# EAGLE board Servomoter (EAGLE 9.7.0)

Size 170.57 x 98.59 mm. Coordinates in mm from the lower left corner, seen from the top.
Outline: 0,0 170.57,0 170.57,98.59 0,98.59 0,0
Copper layers (1*16): Top 0.035mm / dielectric 1.5mm / Bottom 0.035mm
Design rules "default": minimum track width 6mil, minimum drill 0.35mm, track to track 6mil, track to pad 6mil, pad to pad 6mil, via to via 6mil, smd to smd 6mil, copper to edge 40mil, drill to drill 6mil, minimum pad ring 10mil, minimum via ring 8mil, stop-mask expansion 4mil, vias tented up to drill 0mil, thermal gap 10mil

## Footprints (pad centres in the part's own frame; a part is rotated, then mirrored left to right if it is on the bottom)
RESAD1016W63L850D250B = drill 0.83 pad 1.43: 1 -5.08,0; 2 5.08,0
SWITCH-MOMENTARY-PTH-6.5MM = drill 1.016 pad 1.88: 1 -3.251,2.261; 2 3.251,2.261; 3 -3.251,-2.261; 4 3.251,-2.261
SG90 = drill 1.016 long: 1 -2.54,0; 2 0,0; 3 2.54,0
ARDUINO-UNO-R3-SHIELD = drill 1.016 pad 1.88: 3.3V 24.13,-2.54; 5V 24.13,0; A0 24.13,12.7; A1 24.13,15.24; A2 24.13,17.78; A3 24.13,20.32; A4 24.13,22.86; A5 24.13,25.4; AREF -24.13,-13.97; D2 -24.13,20.32; D3 -24.13,17.78; D4 -24.13,15.24; D5 -24.13,12.7; D6 -24.13,10.16; D7 -24.13,7.62; D8 -24.13,3.81; D9 -24.13,1.27; D10 -24.13,-1.27; D11 -24.13,-3.81; D12 -24.13,-6.35; D13 -24.13,-8.89; GND@0 24.13,2.54; GND@1 24.13,5.08; GND@2 -24.13,-11.43; IOREF 24.13,-7.62; NC 24.13,-10.16; RES 24.13,-5.08; RX -24.13,25.4; SCL -24.13,-19.05; SDA -24.13,-16.51; TX -24.13,22.86; VIN 24.13,7.62

## Placement (x,y rotation side)
R1  1k  [RESAD1016W63L850D250B]  82.79,59.86 90 top
R2  1k  [RESAD1016W63L850D250B]  82.79,34.46 90 top
R3  1k  [RESAD1016W63L850D250B]  82.79,16.68 90 top
S1  SWITCH_MOMENTARY  [SWITCH-MOMENTARY-PTH-6.5MM]  94.22,52.24 0 top
S2  SWITCH_MOMENTARY  [SWITCH-MOMENTARY-PTH-6.5MM]  94.22,26.84 0 top
S3  SWITCH_MOMENTARY  [SWITCH-MOMENTARY-PTH-6.5MM]  94.22,9.06 0 top
SERVO1  SERVOSG90  [SG90]  141.46,91.61 90 top
SERVO2  SERVOSG90  [SG90]  163.59,57.29 90 top
SERVO3  SERVOSG90  [SG90]  158.91,28.77 90 top
U1  ARDUINO-UNO-R3-SHIELD  [ARDUINO-UNO-R3-SHIELD]  29.84,34.52 180 top

## Library data of the parts
R1-R3 S1-S3 SERVO1-SERVO3 U1 = Tinkercad

## Nets
U1_5V: R1.2 R2.2 R3.2 SERVO1.2 SERVO2.2 SERVO3.2 U1.5V
U1_D2: SERVO3.3 U1.D2
U1_D3: SERVO2.3 U1.D3
U1_D4: SERVO1.3 U1.D4
U1_D8: R3.1 S3.1 S3.2 U1.D8
U1_D9: R2.1 S2.1 S2.2 U1.D9
U1_D10: R1.1 S1.1 S1.2 U1.D10
U1_GND: S1.3 S1.4 S2.3 S2.4 S3.3 S3.4 SERVO1.1 SERVO2.1 SERVO3.1 U1.GND@0 U1.GND@1 U1.GND@2

## Tracks (layer width: path | path; a pad name or v marks a point on that pad's centre or on a via)
U1_5V  (6 unrouted)
U1_D2  (1 unrouted)
U1_D3  (1 unrouted)
U1_D4  (1 unrouted)
U1_D8  (3 unrouted)
U1_D9  (3 unrouted)
U1_D10  (3 unrouted)
U1_GND  (11 unrouted)